# Altium PCB 990207_PCB.PcbDoc
Units mm, origin at the board's own origin, x right, y up, seen from the top; angles counter-clockwise.
Board outline 64.39 x 76.58 mm, 2 copper layers (Top Layer, Bottom Layer); 32 components, 40 nets, 148 pads, 0 vias.
Unrouted connection lines stored in the file: 78.
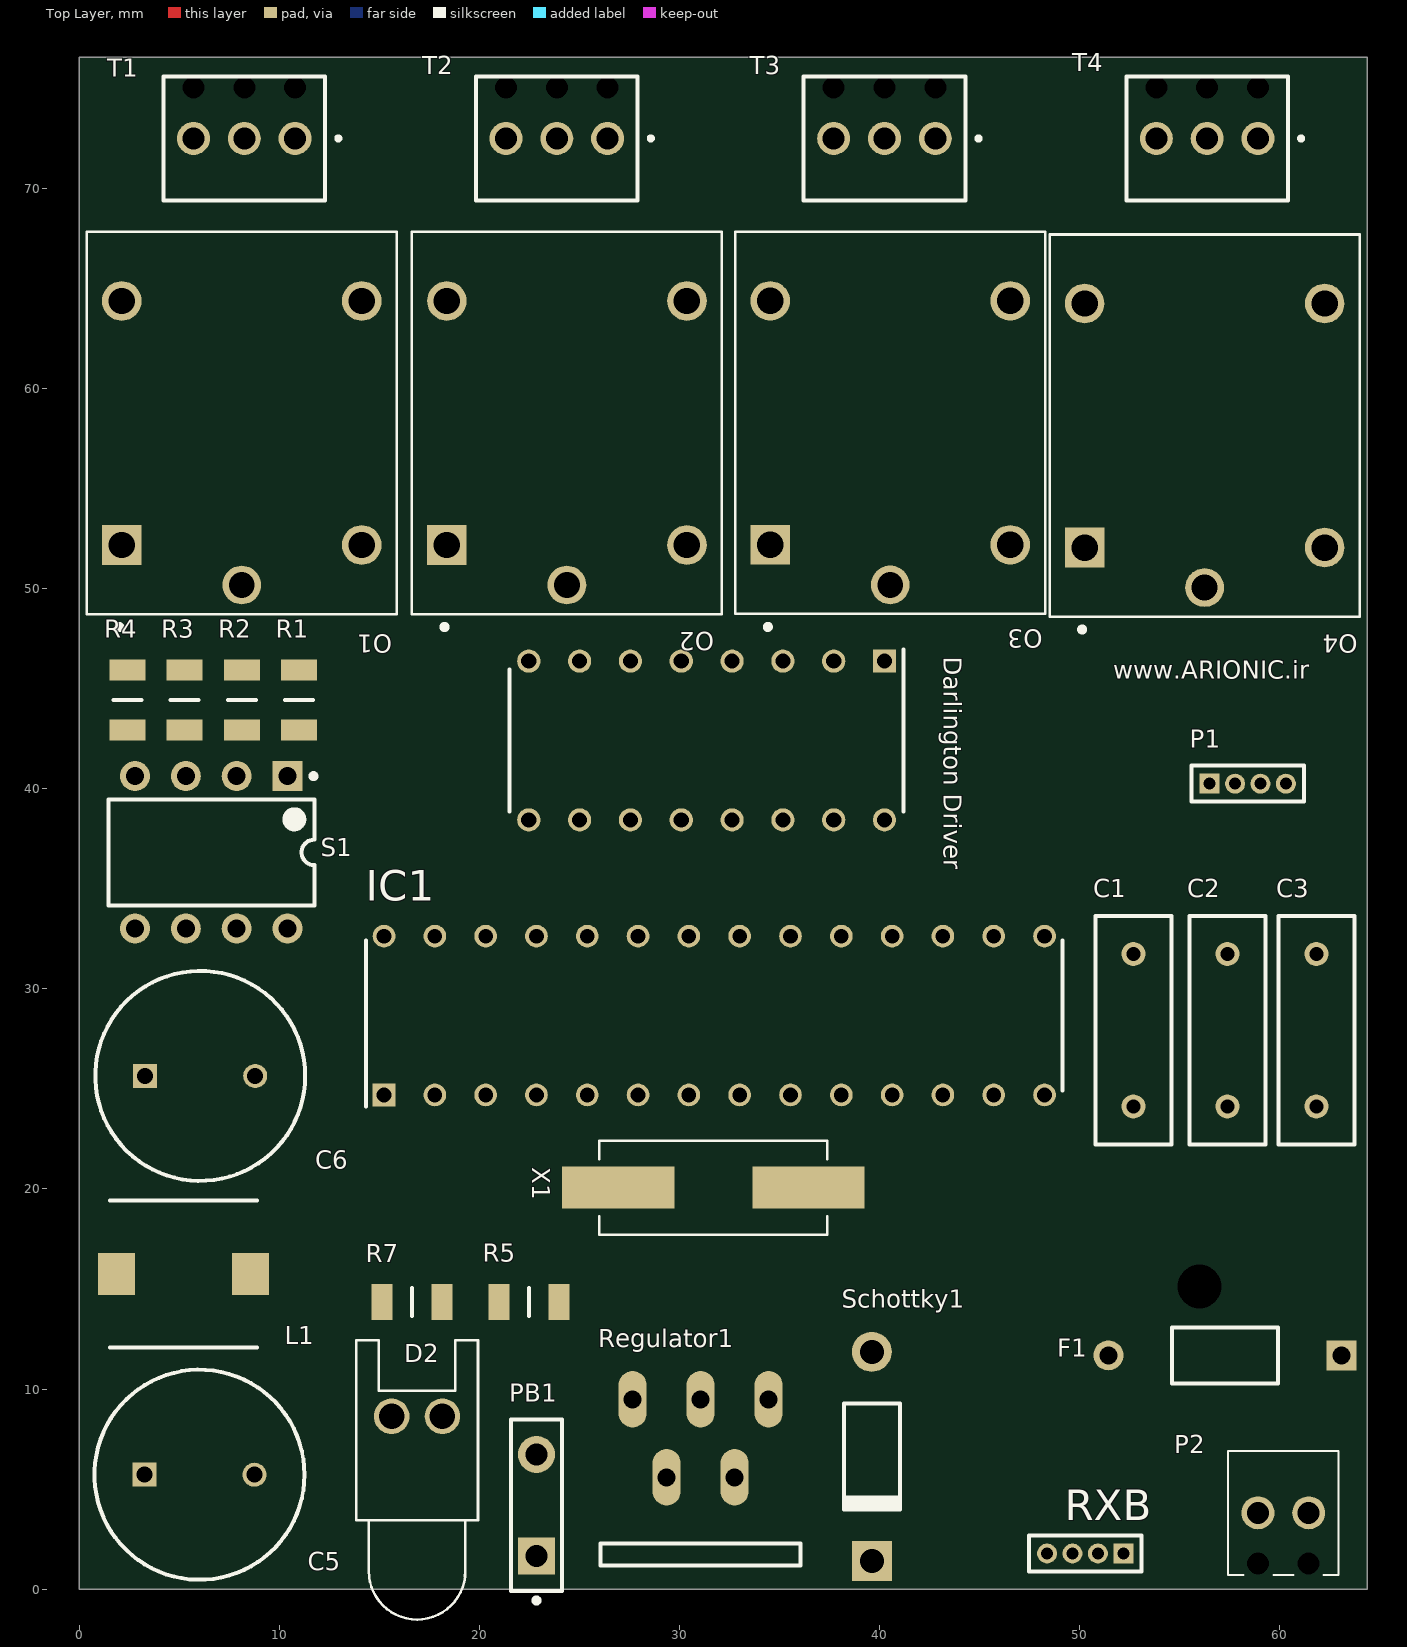
[diagram p0: Top Layer view]
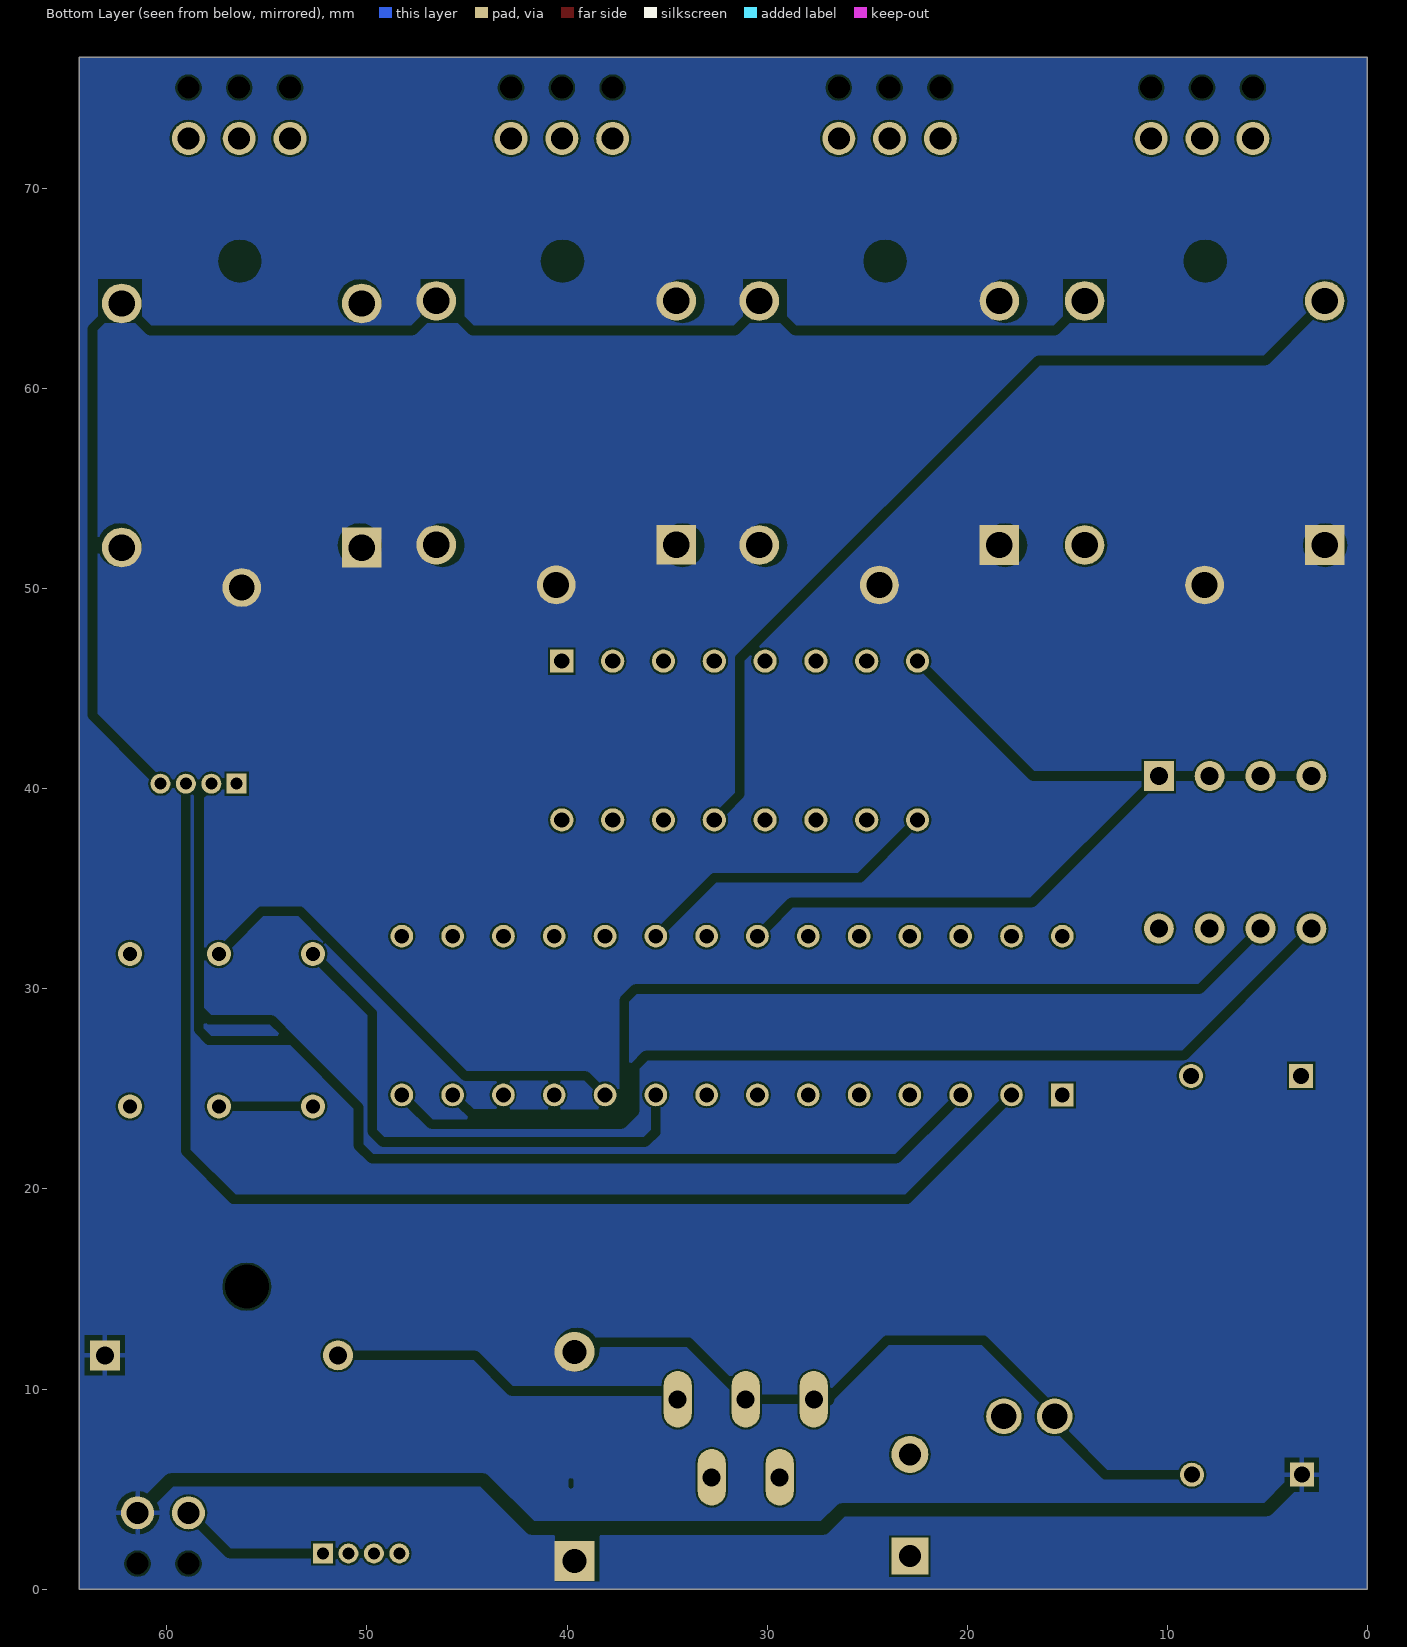
[diagram p1: Bottom Layer view, seen from below]

## Layer stack, top to bottom
Top Solder: solder mask 0.0102, Solder Resist, Dk 3.5
Top Layer: signal copper 0.0356
Dielectric 1: dielectric 0.32, FR-4, Dk 4.8
Bottom Layer: signal copper 0.0356
Bottom Solder: solder mask 0.0102, Solder Resist, Dk 3.5

## Board outline
0,0 64.389,0 64.389,76.581 0,76.581

## Design rules (kind name [scope] priority, off if disabled: settings)
Clearance [All] p1: gap=0.1 ignorepadtopadclearanceinfootprint=FALSE
PolygonConnect [All] p1: connectstyle=Relief reliefconductorwidth=0.254 reliefentries=4 polygonreliefangle="90 Angle" airgapwidth=0.254
RoutingVias [All] p1: holewidth=0.711 width=1.27 viastyle="Through Hole" minholewidth=0.711 minwidth=1.27 maxholewidth=0.711 maxwidth=1.27
SolderMaskExpansion [All] p1: expansion=0.102 istentingtop=FALSE
Width [InNet('No Net')] p1: maxlimit=0.45 minlimit=0.1 preferedwidth=0.25
30 further rules are at their usual default settings.

## Classes and differential pairs
component class 990207_Schematic: C1 C2 C3 C5 C6 D2 F1 IC1 L1 O2 O3 O4 P1 P2 PB1 R1 R2 R3 R4 R5 R7 Regulator1 S1 Schottky1 T1 T2 T3 T4 X1

## Components (designator, comment, footprint, x,y, rotation, side; value= is the part's Value field where it differs from the comment)
C1 "Cap" RAD-0.3 52.705,27.94 r90 top value=20pF
C2 "Cap" RAD-0.3 57.404,27.94 r90 top value=20pF
C3 "0.1uF" RAD-0.3 61.849,27.94 r270 top
C5 "100uF" CAPPRD550W60D1050H2150 3.263,5.715 r0 top
C6 "1000uF" CAPPRD550W60D1050H2150 3.302,25.654 r0 top
D2 "LED0" LED-0 16.891,8.636 r0 top
"Darlington Driver" "ULN2003A" DIP794W56P254L1918H533Q16N 31.369,42.418 r270 top
F1 "Fuse 1" PIN-W2/E2.8 57.277,11.684 r180 top
IC1 "ATMEGA8A-PU" DIP794W53P254L3467H457Q28N 31.75,28.67 r90 top
L1 "B82472P6152M000" INDPM7474X450N 5.207,15.748 r0 top
O1 "SRD-05VDC-SL-C" RELAY_SRD-05VDC-SL-C 8.128,58.293 r90 top
O2 "SRD-05VDC-SL-C" RELAY_SRD-05VDC-SL-C 24.384,58.293 r90 top
O3 "SRD-05VDC-SL-C" RELAY_SRD-05VDC-SL-C 40.544,58.297 r90 top
O4 "SRD-05VDC-SL-C" RELAY_SRD-05VDC-SL-C 56.261,58.166 r90 top
P1 "MHDR1X4" MHDR1X4 56.515,40.259 r0 top
P2 "INPUT_24V" 1725656 60.198,0.71 r0 top
PB1 "SW-PB" SPST-2 22.86,4.191 r90 top
R1 "CRCW120610M0FKEA" RESC3216X60N 10.987,44.45 r90 top
R2 "CRCW120610M0FKEA" RESC3216X60N 8.129,44.45 r90 top
R3 "CRCW120610M0FKEA" RESC3216X60N 5.271,44.45 r90 top
R4 "CRCW120610M0FKEA" RESC3216X60N 2.413,44.45 r90 top
R5 "CRCW120610M0FKEA" RESC3216X60N 22.479,14.351 r0 top
R7 "1K" RESC3216X60N 16.637,14.351 r0 top
Regulator1 "LM2576" TO220-5 31.066,1.088 r180 top
RXB "MHDR1X4" MHDR1X4 52.197,1.778 r180 top (schematic designator RX1)
S1 "SW-DIP4" DIP-8 6.604,36.83 r270 top
Schottky1 "1N5822" DO-41 39.624,6.627 r270 top
T1 "1725669" 1725669 10.795,72.517 r180 top
T2 "1725669" 1725669 26.416,72.517 r180 top
T3 "1725669" 1725669 42.799,72.517 r180 top
T4 "1725669" 1725669 58.928,72.517 r180 top
X1 "16MHZ" XTAL_ABLS-8.000MHZ-B2-T 31.699,20.066 r180 top

## Footprints (in the part's own frame and the unit in brackets; to place one, negate y for a bottom-side part, rotate by r counter-clockwise, add the part's x,y. Pads: shape width x height; smd on the part's side, far side on the other; paste and mask are expansions set on the pad)
1725656 [mm]
  round 1.65 hole 1.1: 1(-1.27,3.1) 2(1.27,3.1)
  round 0.55 hole 1.1 unplated: 3(-1.27,0.56) 4(1.27,0.56)
  silkscreen extent -2.77,0 2.77,6.2, body extent -2.77,0 2.77,6.2, height 8
1725669 [mm]
  round 1.65 hole 1.1: 1(0,0) 2(2.54,0) 3(5.08,0)
  round 0.55 hole 1.1 unplated: 4(0,-2.54) 5(2.54,-2.54) 6(5.08,-2.54)
  silkscreen extent -2.26,-3.1 6.58,3.1, body extent -1.5,-3.1 6.58,3.1, height 8.5
CAPPRD550W60D1050H2150 [mm]
  rect 1.2x1.2 hole 0.8: 1(0,0)
  round 1.2 hole 0.8: 2(5.5,0)
  silkscreen extent -2.5,-5.25 8,5.25, body extent -2.5,-5.25 8,5.25, height 21.5
DIP794W53P254L3467H457Q28N [mm]
  rect 1.133x1.133 hole 0.733: 1(-3.969,16.51)
  round 1.133 hole 0.733: 2(-3.969,13.97) 3(-3.969,11.43) 4(-3.969,8.89) 5(-3.969,6.35) 6(-3.969,3.81) 7(-3.969,1.27) 8(-3.969,-1.27) 9(-3.969,-3.81) 10(-3.969,-6.35) 11(-3.969,-8.89) 12(-3.969,-11.43) 13(-3.969,-13.97) 14(-3.969,-16.51) 15(3.969,-16.51) 16(3.969,-13.97) 17(3.969,-11.43) 18(3.969,-8.89) 19(3.969,-6.35) 20(3.969,-3.81) 21(3.969,-1.27) 22(3.969,1.27) 23(3.969,3.81) 24(3.969,6.35) 25(3.969,8.89) 26(3.969,11.43) 27(3.969,13.97) 28(3.969,16.51)
  silkscreen extent -4.54,-17.4 3.75,17.4, body extent -4.1,-17.34 4.1,17.34, height 4.57
DIP794W56P254L1918H533Q16N [mm]
  rect 1.16x1.16 hole 0.76: 1(-3.97,8.89)
  round 1.16 hole 0.76: 2(-3.97,6.35) 3(-3.97,3.81) 4(-3.97,1.27) 5(-3.97,-1.27) 6(-3.97,-3.81) 7(-3.97,-6.35) 8(-3.97,-8.89) 9(3.97,-8.89) 10(3.97,-6.35) 11(3.97,-3.81) 12(3.97,-1.27) 13(3.97,1.27) 14(3.97,3.81) 15(3.97,6.35) 16(3.97,8.89)
  silkscreen extent -4.55,-9.84 3.55,9.84, body extent -4.11,-9.59 4.11,9.59, height 5.33
DIP-8 [mm] "DIP; 8 Leads; Row Spacing 7.62 mm; Pitch 2.54 mm"
  rect 1.5x1.5 hole 0.9: 1(-3.81,3.81)
  round 1.5 hole 0.9: 2(-3.81,1.27) 3(-3.81,-1.27) 4(-3.81,-3.81) 5(3.81,-3.81) 6(3.81,-1.27) 7(3.81,1.27) 8(3.81,3.81)
  silkscreen extent -3.93,-5.15 2.65,5.24, body extent -3.6,-5.15 3.6,5.15, height 5.08
DO-41 [mm] "Diode, Axial; Body 5.2 x 2.7 mm (LxDia. max), Lead Dia. 0.86 mm (max)"
  round 2 hole 1.2: 1(-5.23,0)
  rect 2x2 hole 1.2: 2(5.23,0)
  silkscreen extent -2.65,-1.4 2.75,1.4
INDPM7474X450N [mm]
  rect 1.85x2.1 smd: 1(-3.35,0) 2(3.35,0)
  silkscreen extent -3.67,-3.67 3.68,3.68, body extent -3.67,-3.67 3.67,3.67, height 4.5
LED-0 [mil] "LED; 2 Leads"
  round 70 hole 50: 1(50,0) 2(-50,0)
  silkscreen extent -120,-400 120,150
MHDR1X4 [mm] "Connector; Header; 4 Position"
  rect 1x1 hole 0.6: 1(0,0)
  round 1 hole 0.6: 2(1.27,0) 3(2.54,0) 4(3.81,0)
  silkscreen extent -0.9,-0.9 4.71,0.9
PIN-W2/E2.8 [mm] "Thru-Hole; 2 Leads"
  rect 1.5x1.5 hole 0.9: 1(-5.825,0)
  round 1.5 hole 0.9: 2(5.825,0)
  silkscreen extent -2.65,-1.4 2.65,1.4
RAD-0.3 [mm] "Radial Cap, Thru-Hole; 2 Leads; 0.3 in Pin Spacing"
  round 1.2 hole 0.7: 1(-3.81,0) 2(3.81,0)
  silkscreen extent -5.71,-1.91 5.71,1.91
RELAY_SRD-05VDC-SL-C [mm]
  rect 1.98x1.98 hole 1.32: A1(-6.1,6)
  round 1.98 hole 1.32: A2(-6.1,-6) NC(6.1,6) NO(6.1,-6)
  round 1.935 hole 1.29: COM(-8.1,0)
  silkscreen extent -10.3,-7.75 9.55,7.75
RESC3216X60N [mm]
  rect 1.05x1.8 smd: 1(-1.5,0) 2(1.5,0)
  silkscreen extent 0,-0.7 0,0.7, body extent -1.58,-0.8 1.58,0.8, height 0.6
SPST-2 [mm] "Switch; 2 Leads"
  rect 1.85x1.85 hole 1.1: 1(-2.54,0)
  round 1.85 hole 1.1: 2(2.54,0)
  silkscreen extent -4.89,-1.27 4.28,1.27
TO220-5 [mm]
  oval 1.408x2.816 hole 0.9: 1(-3.4,-8.4) 2(-1.7,-4.5) 3(0,-8.4) 4(1.7,-4.5) 5(3.4,-8.4)
  silkscreen extent -5,-1.2 5,-0.1
XTAL_ABLS-8.000MHZ-B2-T [mm]
  rect 5.6x2.1 smd: 1(-4.75,0) 2(4.75,0)
  silkscreen extent -5.7,-2.35 5.7,2.35

## Part data
C1 C2: "Capacitor", LatestRevisionDate=17-Jul-2002, LatestRevisionNote="Re-released for DXP Platform.", PackageDescription="Radial Cap, Thru-Hole; 2 Leads; 0.3 in Pin Spacing", PackageReference=RAD-0.3, Published=8-Jun-2000, Publisher="Altium Limited"
C3: library part Cap, "Capacitor", LatestRevisionDate=17-Jul-2002, LatestRevisionNote="Re-released for DXP Platform.", PackageDescription="Radial Cap, Thru-Hole; 2 Leads; 0.3 in Pin Spacing", PackageReference=RAD-0.3, Published=8-Jun-2000, Publisher="Altium Limited"
C5 C6: library part 108CKE025M, "Capacitor Polarised", Manufacturer_Name=Cinch, Datasheet Link=https://componentsearchengine.com/Datasheets/2/108CKE025M.pdf, Height=21.5mm, Manufacturer_Part_Number=108CKE025M
D2: "Typical INFRARED GaAs LED", LatestRevisionDate=08-Jul-2005, LatestRevisionNote="Mech Layer 1 removed.", PackageDescription="LED; 2 Leads", PackageReference=LED-0, Published=8-Jun-2000, Publisher="Altium Limited"
"Darlington Driver": "Integrated Circuit", Manufacturer_Name=STMicroelectronics, Mouser Part Number=511-ULN2003A, RS Part Number=6868209, Allied_Number=70014189, Allied Price/Stock=http://www.alliedelec.com/stmicroelectronics-uln2003a/70014189/, Datasheet Link=http://www.st.com/web/en/resource/technical/document/datasheet/CD00001244.pdf, Height=5.33mm, Manufacturer_Part_Number=ULN2003A, Mouser Price/Stock=https://www.mouser.com/Search/Refine.aspx?Keyword=511-ULN2003A, RS Price/Stock=http://uk.rs-online.com/web/p/products/6868209
F1: "Fuse", LatestRevisionDate=17-Jul-2002, LatestRevisionNote="Re-released for DXP Platform.", PackageDescription="Thru-Hole; 2 Leads", PackageReference=PIN-W2/E2.8, Published=8-Jun-2000, Publisher="Altium Limited"
IC1: "Integrated Circuit", Manufacturer_Name=Microchip, Mouser Part Number=556-ATMEGA8A-PU, RS Part Number=1310372P, Datasheet Link=http://www.atmel.com/images/atmel-8159-8-bit-avr-microcontroller-atmega8a_summary.pdf, Height=4.572mm, Manufacturer_Part_Number=ATMEGA8A-PU, Mouser Price/Stock=https://www.mouser.com/Search/Refine.aspx?Keyword=556-ATMEGA8A-PU, RS Price/Stock=http://uk.rs-online.com/web/p/products/1310372P
L1: "Inductor", Manufacturer_Name=EPCOS, Mouser Part Number=871-B82472P6152M000, Datasheet Link=https://www.tdk-electronics.tdk.com/inf/30/db/ind_2008/b82472p6.pdf, Height=4.5mm, Manufacturer_Part_Number=B82472P6152M000, Mouser Price/Stock=https://www.mouser.com/Search/Refine.aspx?Keyword=871-B82472P6152M000
O1 O2 O3 O4: "5V Trigger Relay Module For Arduino And Raspberry Pi 5V Trigger Relay Module For Arduino And Raspberry Pi", Package=None, Availability=Unavailable, MF="Songle Relay", MP=SRD-05VDC-SL-C, Price=None, SnapEDA_Link=https://www.snapeda.com/parts/SRD-05VDC-SL-C/Songle%20Relay/view-part/1029484/?ref=snap
P1 RXB: "Header, 4-Pin", LatestRevisionDate=17-Jul-2002, LatestRevisionNote="Re-released for DXP Platform.", Publisher="Altium Limited"
P2: library part 1725656, "Connector", Manufacturer_Name="Phoenix Contact", Mouser Part Number=651-1725656, RS Part Number=3909023, Allied_Number=70054335, Allied Price/Stock=http://www.alliedelec.com/phoenix-contact-1725656/70054335/, Datasheet Link=https://www.phoenixcontact.com/online/portal/gb?uri=pxc-oc-itemdetail:pid=1725656&library=gben&tab=1, Height=8mm, Manufacturer_Part_Number=1725656, Mouser Price/Stock=https://www.mouser.com/Search/Refine.aspx?Keyword=651-1725656, RS Price/Stock=https://uk.rs-online.com/web/p/products/3909023
PB1: "Switch", LatestRevisionDate=17-Jul-2002, LatestRevisionNote="Re-released for DXP Platform.", PackageDescription="Switch; 2 Leads", PackageReference=SPST-2, Published=24-Mar-1999, Publisher="Altium Limited"
R1 R2 R3 R4 R5: "Resistor", Manufacturer_Name=Vishay, Mouser Part Number=71-CRCW1206-10M-E3, Allied_Number=70204450, Allied Price/Stock=https://www.alliedelec.com/vishay-dale-crcw120610m0fkea/70204450/, Height=0.6mm, Manufacturer_Part_Number=CRCW120610M0FKEA, Mouser Price/Stock=https://www.mouser.com/Search/Refine.aspx?Keyword=71-CRCW1206-10M-E3
R7: library part CRCW120610M0FKEA, "Resistor", Manufacturer_Name=Vishay, Mouser Part Number=71-CRCW1206-10M-E3, Allied_Number=70204450, Allied Price/Stock=https://www.alliedelec.com/vishay-dale-crcw120610m0fkea/70204450/, Height=0.6mm, Manufacturer_Part_Number=CRCW120610M0FKEA, Mouser Price/Stock=https://www.mouser.com/Search/Refine.aspx?Keyword=71-CRCW1206-10M-E3
Regulator1: "Buck Switching Regulator IC Positive Fixed 5V 1 Output 3A TO-263-6, DÂ²Pak _5 Leads + Tab_, TO-263BA", Package="TO-263-6 National Semiconductor", Availability=Unavailable, MF="Texas Instruments", MP=LM2576, Price=None, SnapEDA_Link=https://www.snapeda.com/parts/LM2576/Texas%20Instruments/view-part/214937/?ref=snap
S1: "DIP Switch", LatestRevisionDate=17-Jul-2002, LatestRevisionNote="Re-released for DXP Platform.", PackageReference=DIP-8, Published=24-Mar-1999, Publisher="Altium Limited"
Schottky1: library part "Diode 1N4001", "1 Amp General Purpose Rectifier", Code_JEDEC=DO-204-AL, ComponentLink1Description="Manufacturer Link", ComponentLink1URL=http://www.fairchildsemi.com/, ComponentLink2Description=Datasheet, ComponentLink2URL=http://www.fairchildsemi.com/ds/1N%2F1N4001.pdf, DatasheetVersion=1998, LatestRevisionDate=17-Jul-2002, LatestRevisionNote="Re-released for DXP Platform.", PackageDescription="Diode, Axial; Body 5.2 x 2.7 mm (LxDia. max), Lead Dia. 0.86 mm (max)", PackageReference=DO-41, PackageVersion=Aug-1999, Published=8-Jun-2000, Publisher="Altium Limited"
T1 T2 T3 T4: "Connector", Manufacturer_Name="Phoenix Contact", Mouser Part Number=651-1725669, RS Part Number=3909039, Allied_Number=70054336, Allied Price/Stock=http://www.alliedelec.com/phoenix-contact-1725669/70054336/, Datasheet Link=https://www.phoenixcontact.com/online/portal/gb?uri=pxc-oc-itemdetail:pid=1725669&library=gben&tab=1, Height=8.5mm, Manufacturer_Part_Number=1725669, Mouser Price/Stock=https://www.mouser.com/Search/Refine.aspx?Keyword=651-1725669, RS Price/Stock=https://uk.rs-online.com/web/p/products/3909039
X1: library part ABLS-8.000MHZ-B2-T, "8MHz Â±20ppm Crystal 18pF 80 Ohms HC-49/US", Package="HC-49/US Abracon LLC", Availability=Unavailable, MF="Abracon LLC", MP=ABLS-8.000MHZ-B2, Price=None, SnapEDA_Link=https://www.snapeda.com/parts/ABLS-8.000MHZ-B2/Abracon%20LLC/view-part/2753215/?ref=snap

## Free pads (board coordinates)
  round 1.524 hole 2.2: 2(56.007,15.113)

## Nets (pads, with @x,y where several pads share a name; then routed paths per layer and width w, separated by ;. In a path a pad name is that pad's centre, name@x,y a point inside that pad or via, vN(x,y) a via of type N, cw(c..) or ccw(c..) an arc to the next point about the centre after c; other vN are vias at no path point)
5V: "Darlington Driver.9" C3.1 C6.1 IC1.7 IC1.20 L1.2 O1.A1 O2.A1 O3.A1 O4.A1 P1.4 R1.2 R2.2 R3.2 R4.2 R5.1 R7.1 Regulator1.4 RXB.4
24V: C5.1 F1.1 P2.2
DATA1: IC1.16 RXB.3
DATA2: IC1.15 RXB.2
GND: "Darlington Driver.8" C1.1 C2.1 C3.2 C5.2 C6.2 D2.2 IC1.8 IC1.22 P1.1 P2.1 PB1.1 Regulator1.3 Regulator1.5 RXB.1 S1.1 S1.2 S1.3 S1.4 Schottky1.1
MISO: IC1.18
MOSI: IC1.17
NetC1_2: C1.2 IC1.9 X1.2
NetC2_2: C2.2 IC1.10 X1.1
NetD2_1: D2.1 R7.2
"NetDarlington Driver_13": "Darlington Driver.13" O1.A2
"NetDarlington Driver_14": "Darlington Driver.14" O2.A2
"NetDarlington Driver_15": "Darlington Driver.15" O3.A2
"NetDarlington Driver_16": "Darlington Driver.16" O4.A2
NetF1_2: F1.2 Regulator1.1
NetL1_1: L1.1 Regulator1.2 Schottky1.2
NetO1_COM: O1.COM T1.2
NetO1_NC: O1.NC T1.1
NetO1_NO: O1.NO T1.3
NetO2_COM: O2.COM T2.2
NetO2_NC: O2.NC T2.1
NetO2_NO: O2.NO T2.3
NetO3_COM: O3.COM T3.2
NetO3_NC: O3.NC T3.1
NetO3_NO: O3.NO T3.3
NetO4_COM: O4.COM T4.2
NetO4_NC: O4.NC T4.1
NetO4_NO: O4.NO T4.3
PB0: IC1.14 R4.1 S1.5
PD5: IC1.11 R1.1 S1.8
PD6: IC1.12 R2.1 S1.7
PD7: IC1.13 R3.1 S1.6
RL1: "Darlington Driver.1" IC1.23
RL2: "Darlington Driver.2" IC1.24
RL3: "Darlington Driver.3" IC1.25
RL4: "Darlington Driver.4" IC1.26
RST: IC1.1 PB1.2
RX: IC1.3 P1.2
SCK: IC1.19
TX: IC1.2 P1.3
pads on no net: "Darlington Driver.5" "Darlington Driver.6" "Darlington Driver.7" "Darlington Driver.10" "Darlington Driver.11" "Darlington Driver.12" IC1.4 IC1.5 IC1.6 IC1.21 IC1.27 IC1.28 P2.3 P2.4 R5.2 T1.4 T1.5 T1.6 T2.4 T2.5 T2.6 T3.4 T3.5 T3.6 T4.4 T4.5 T4.6

## Polygon pours and split planes (outlines as drawn)
24V on Bottom Layer "24V_L02_P000" (solid, pour order 0): 0,76.581 64.389,76.581 64.389,0 0,0

## Silkscreen, mask and mechanical layers (free items; w line width, h text height)
Top Overlay:
  text "www.ARIONIC.ir" at 51.689,45.212 h1.52